# Altium PCB 32B48P_Dev_Board.PcbDoc
Units mil, origin at the board's own origin, x right, y up, seen from the top; angles counter-clockwise.
Board outline 2167.8 x 2470 mil, 4 copper layers (Top Layer, GND Layer, VCC3.3 Layer, Bottom Layer), stack 23.756 mil thick; 47 components, 53 nets, 216 pads, 52 vias.
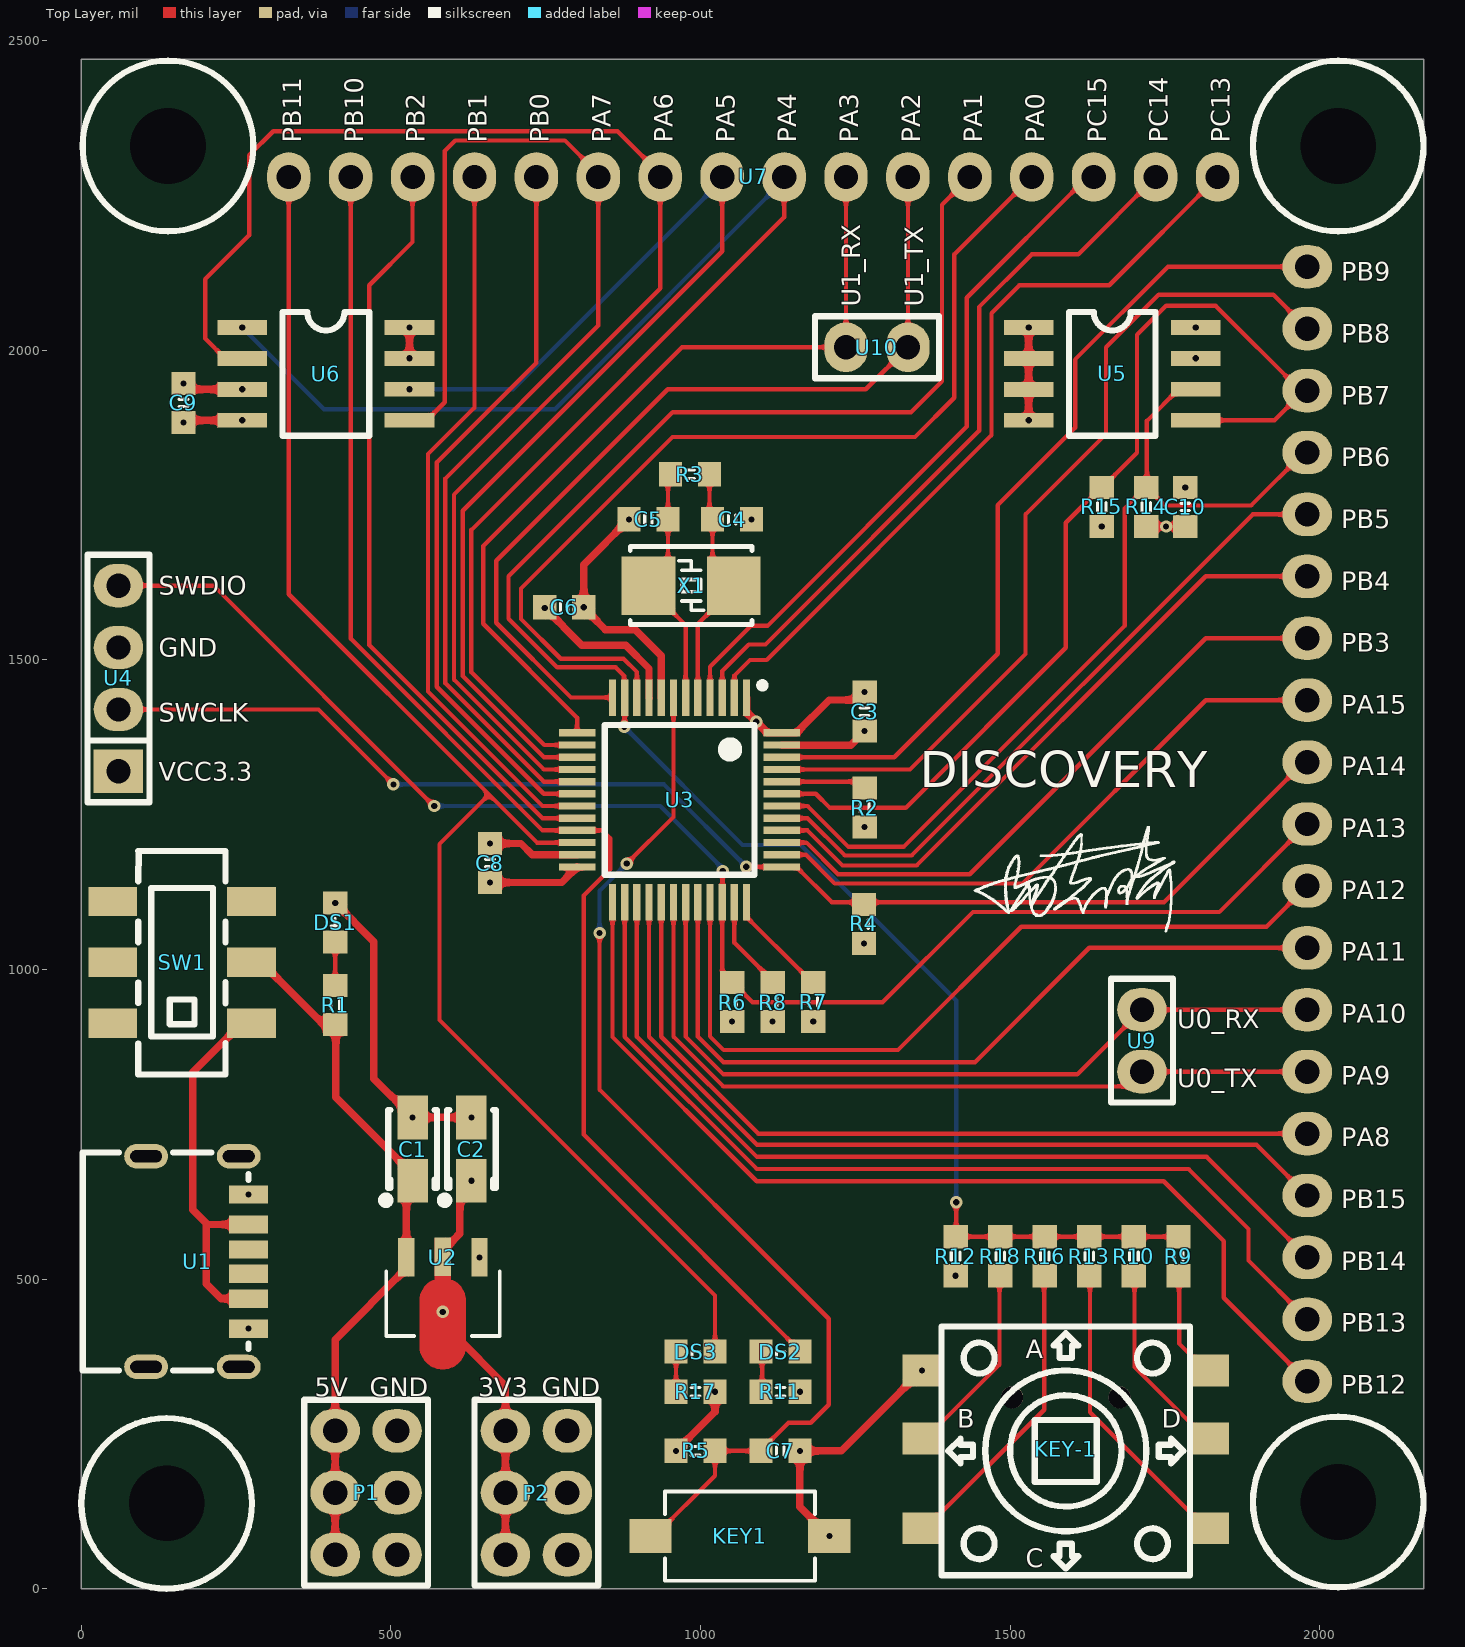
[diagram p0: Top Layer view]
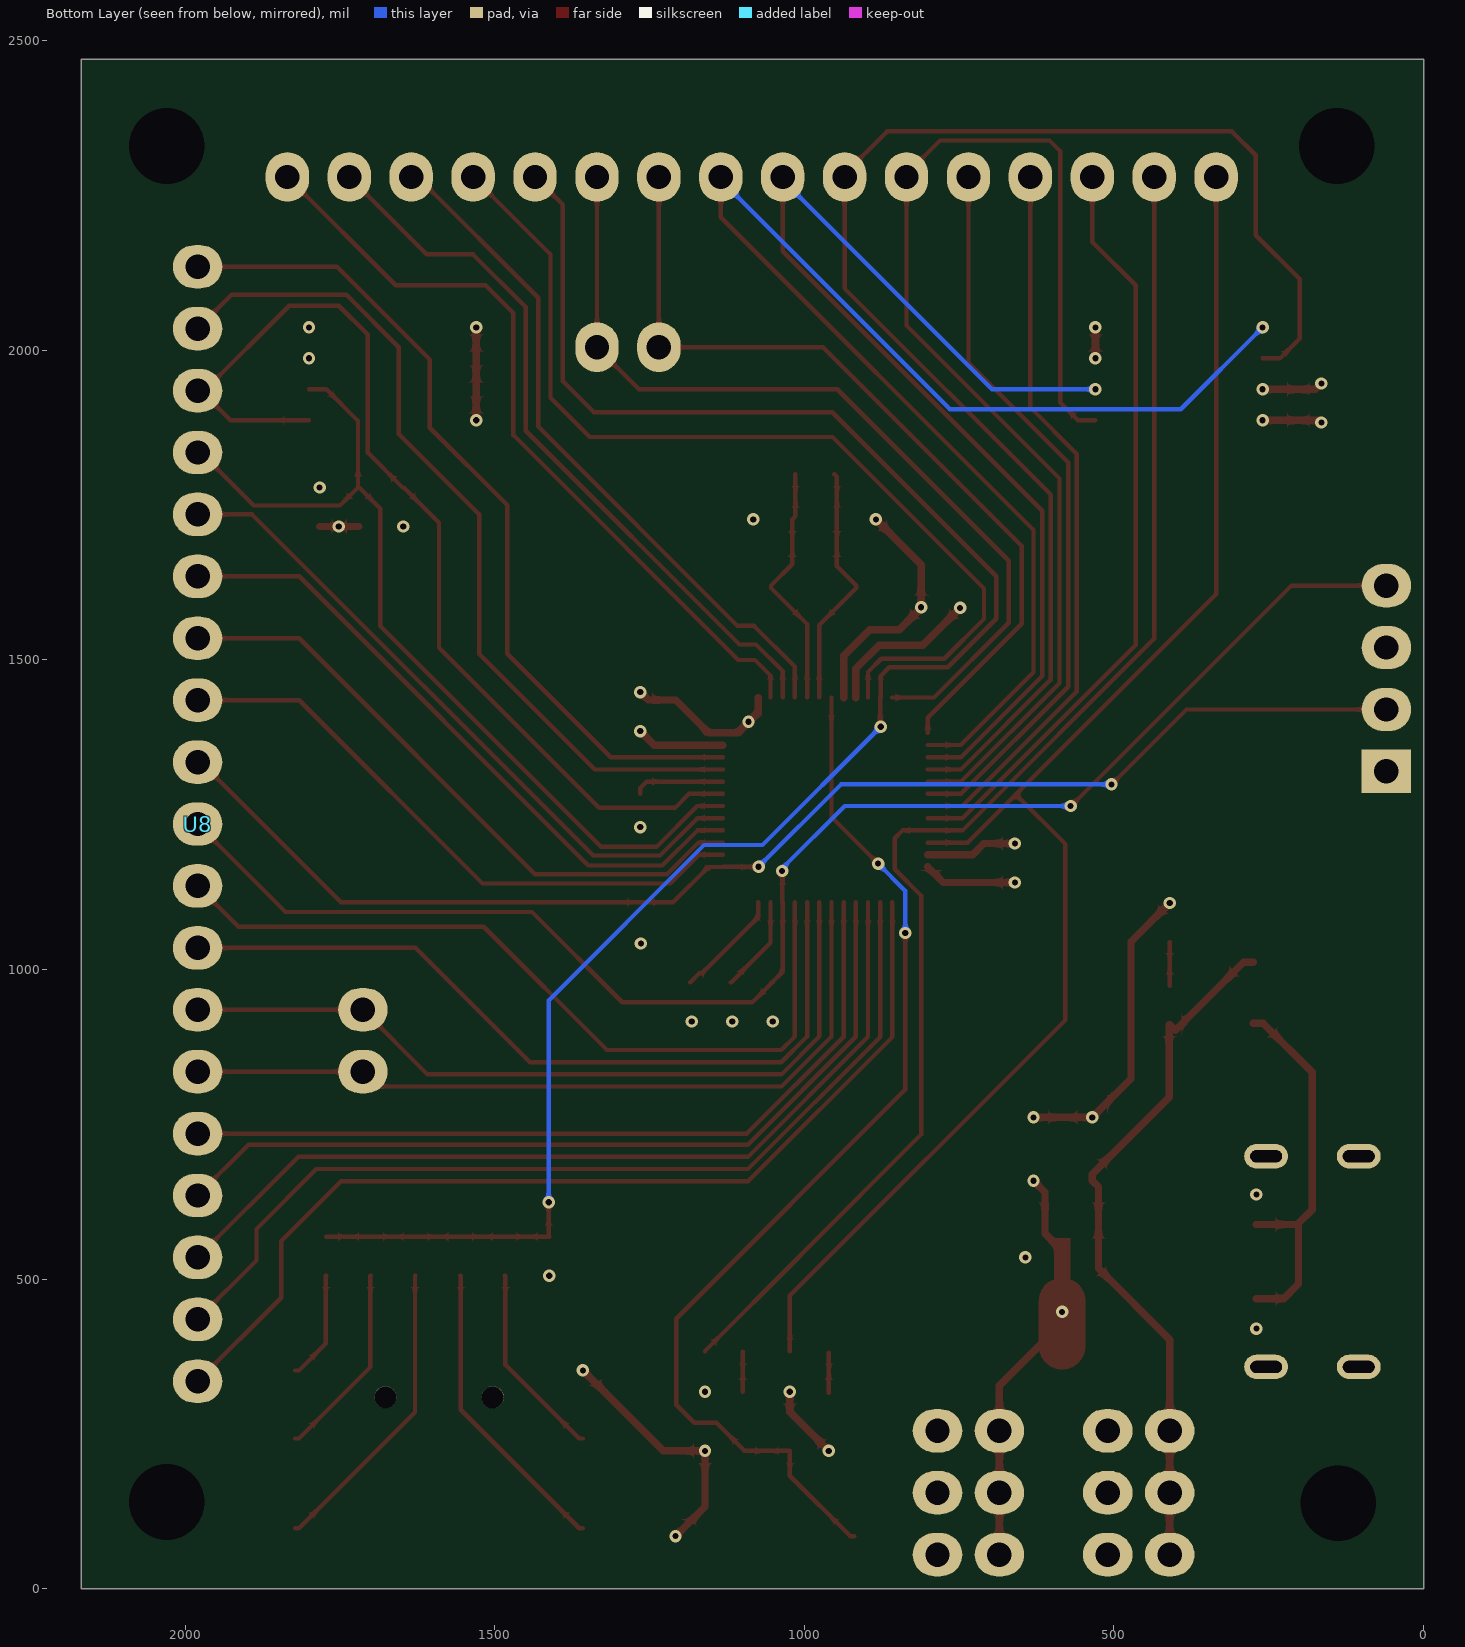
[diagram p1: Bottom Layer view, seen from below]
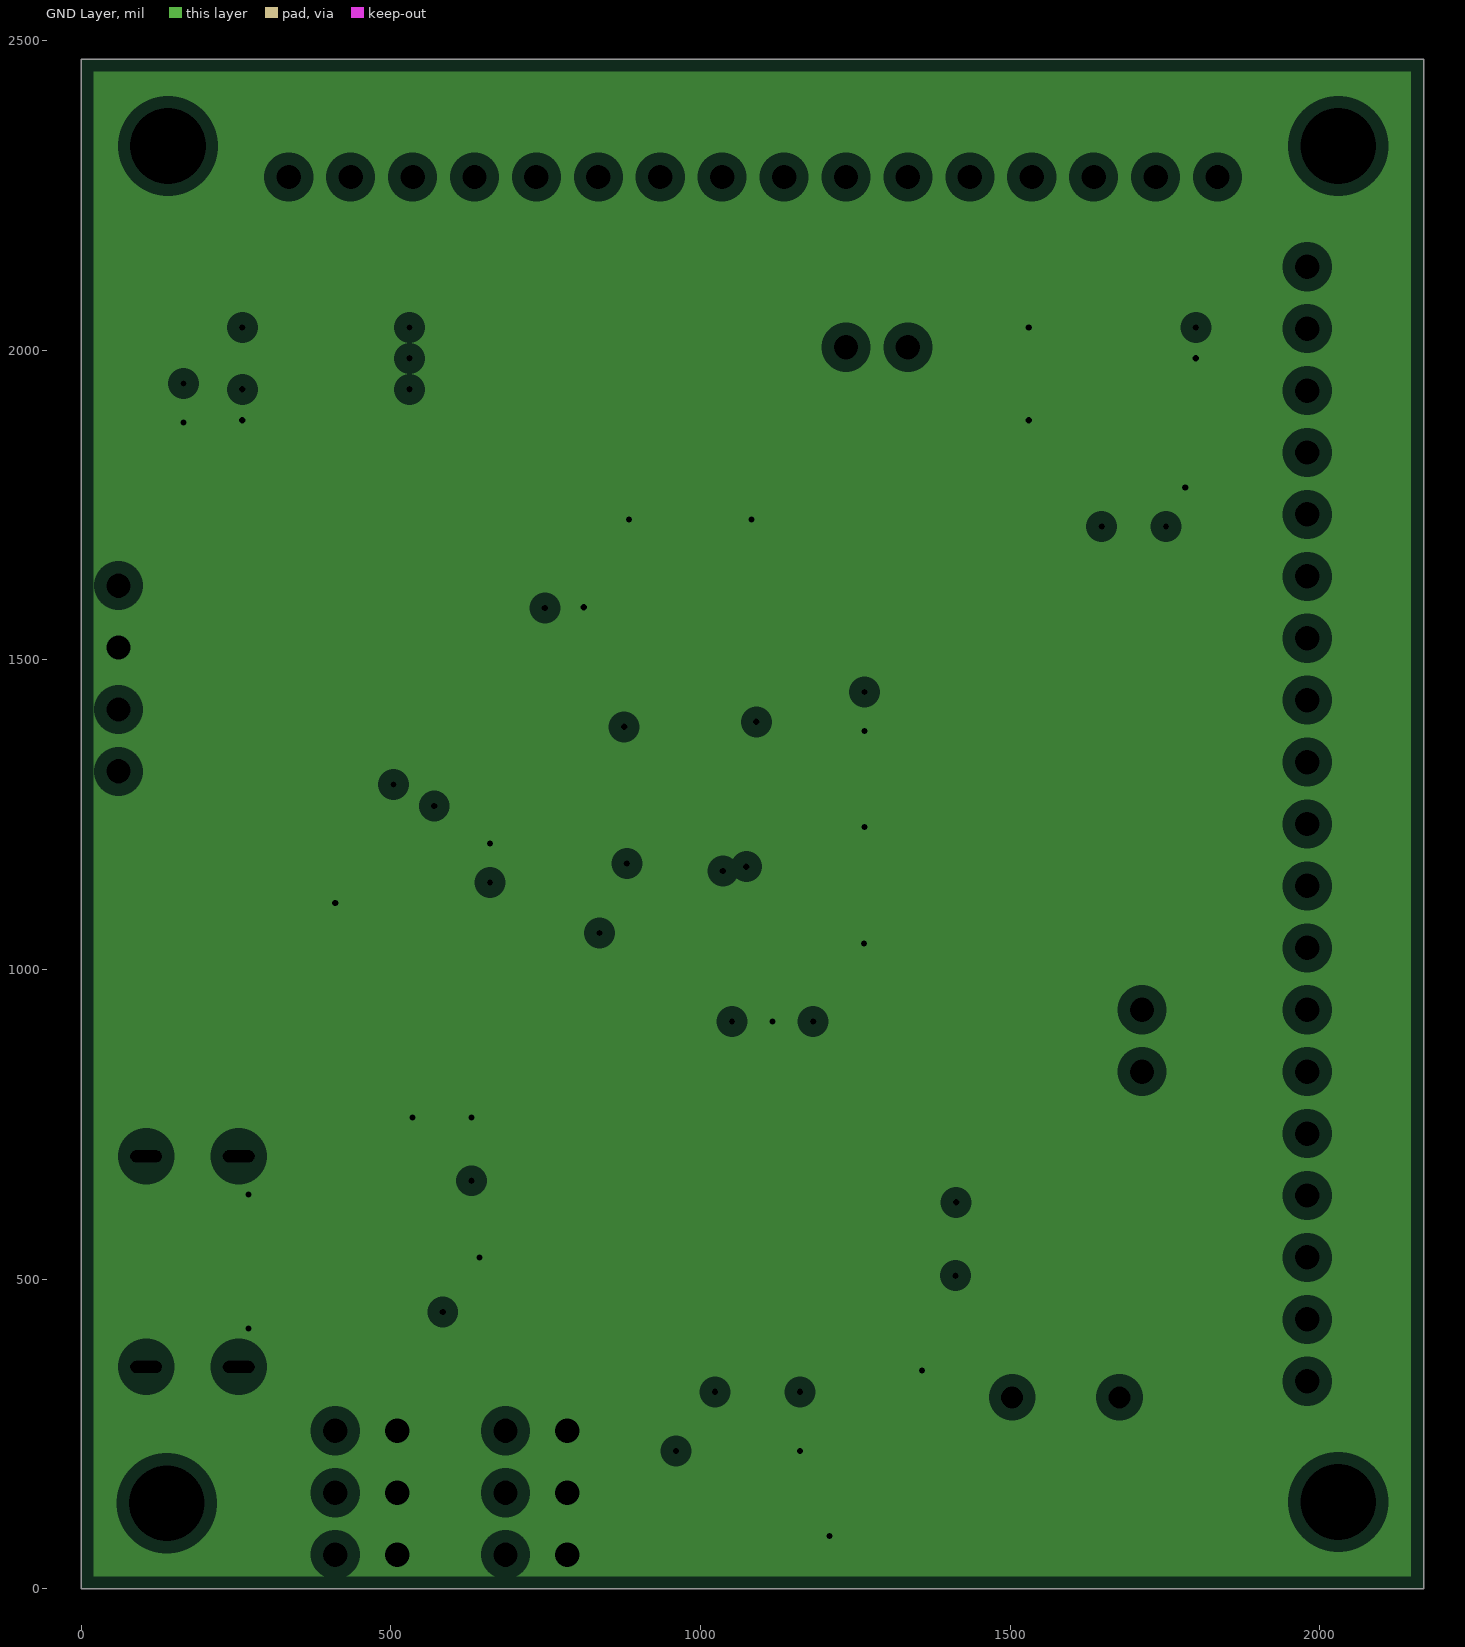
[diagram p2: GND Layer, clearances drawn from the general rule]
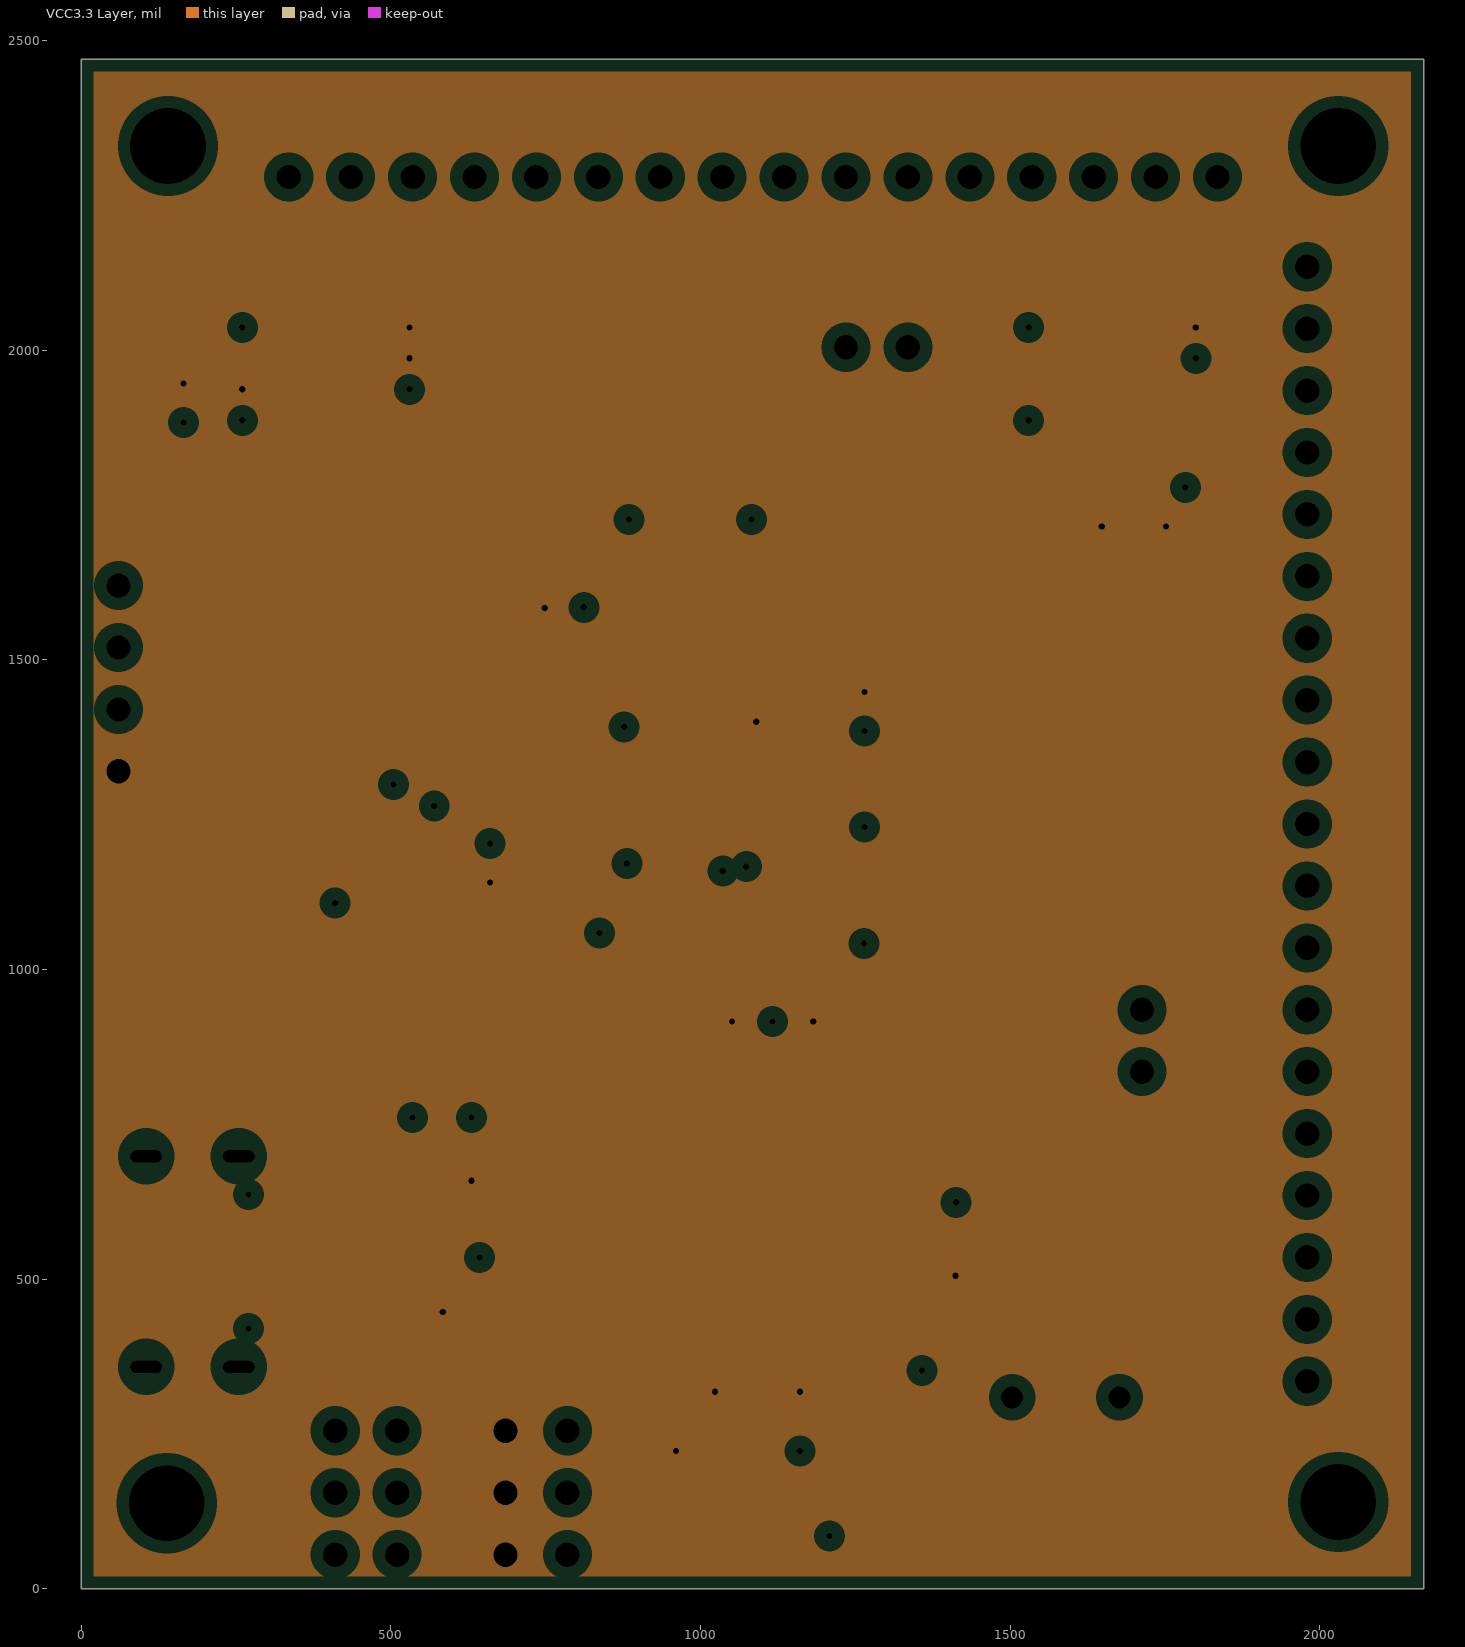
[diagram p3: VCC3.3 Layer, clearances drawn from the general rule]

## Layer stack, top to bottom
Top Solder: solder mask 0.4, Solder Resist, Dk 3.5
Top Layer: signal copper 1.4
Dielectric 2: prepreg 2.8, PP-006, Dk 4.1
GND Layer: plane copper 1.3779, net GND
Dielectric 1: dielectric 12.6, FR-4, Dk 4.8
VCC3.3 Layer: plane copper 1.3779, net VCC3.3
Dielectric 3: prepreg 2.8, PP-006, Dk 4.1
Bottom Layer: signal copper 1.4
Bottom Solder: solder mask 0.4, Solder Resist, Dk 3.5

## Board outline
0,0 0,2470 2167.79,2470 2167.8,0

## Design rules (kind name [scope] priority, off if disabled: settings)
Clearance [All] p1: gap=7 ignorepadtopadclearanceinfootprint=FALSE except(0: Arc-Hole Track-Hole SMDPad-Hole THPad-Hole Via-Hole Fill-Hole Poly-Hole Region-Hole Text-Hole)
ComponentClearance [All] p1: gap=0 collisioncheckmode=3 verticalgap=0 showdistances=FALSE
HoleSize [All] p1: absolutevalues=TRUE maxlimit=11100 minlimit=1 maxpercent=80.000 minpercent=20.000
HoleToHoleClearance [All] p1: gap=0 allowstackedmicrovias=TRUE
MinimumSolderMaskSliver [All] p1: minsoldermaskwidth=0
PlaneClearance [All] p1: clearance=20
PlaneConnect [All] p1: planeconnectstyle=Relief reliefexpansion=20 reliefentries=4 reliefconductorwidth=10 reliefairgap=10
PolygonConnect [All] p1: connectstyle=Relief reliefconductorwidth=10 reliefentries=4 polygonreliefangle="90 Angle" airgapwidth=10
RoutingVias [All] p1: holewidth=10 width=20 viastyle="Through Hole" minholewidth=1 minwidth=1 maxholewidth=2811 maxwidth=5011
SilkToSilkClearance [All] p1: silktosilkclearance=0
SilkToSolderMaskClearance [IsPad] p1: minsilkscreentomaskgap=0 clearancetoexposedcopper=TRUE
SolderMaskExpansion [All] p1: expansion=4
Width [All] p1: maxlimit=77 minlimit=7 preferedwidth=10 minimp=50.000000 maximp=50.000000 favimp=50.000000
22 further rules are at their usual default settings.

## Components (designator, comment, footprint, x,y, rotation, side; value= is the part's Value field where it differs from the comment)
C1 "10uF" CAP-TANTALUM-A 535,710 r90 top
C2 "22uF" CAP-TANTALUM-A 630,710 r90 top
C3 "104" Cap_0603 1265,1416.5 r270 top value=0.1u
C4 "20pF" Cap_0603 1051,1727 r180 top value=0.1u
C5 "20pF" Cap_0603 916,1727 r0 top value=0.1u
C6 "104" Cap_0603 780,1585 r0 top value=0.1u
C7 "104" Cap_0603 1129.01,222.5 r0 top value=0.1u
C8 "104" Cap_0603 660,1172 r270 top value=0.1u
C9 "104" Cap_0603 165,1915 r270 top value=0.1u
C10 "104" Cap_0603 1783,1747 r270 top value=0.1u
DS1 "LED" LED_0603 410,1076 r90 top
DS2 "LED" LED_0603 1129.01,383 r0 top
DS3 "LED" LED_0603 992.01,383 r0 top
KEY1 "KEY-2P" key3*6 1070,90 r0 top
KEY-1 "K1-1504SA-06" SW-SMD_K1-1504SA-06 1590,225 r0 top
P1 "PIN2x3" PIN-2x3-2.54-1.0 460,155 r270 top
P2 "PIN2x3" PIN-2x3-2.54-1.0 735,155 r270 top
R1 "2K" Res_0603 410,942.5 r90 top
R2 "10K" Res_0603 1265,1261.5 r270 top
R3 "1M" Res_0603 983,1800 r0 top
R4 "10K" Res_0603 1264,1073.5 r270 top
R5 "10K" Res_0603 992,222.5 r0 top
R6 "10K" Res_0603 1051,947.5 r90 top
R7 "0" Res_0603 1182,947.5 r270 top
R8 "0" Res_0603 1116.5,947.5 r270 top
R9 "0" Res_0603 1772,537 r90 top
R10 "36K" Res_0603 1700,537 r90 top
R11 "510" Res_0603 1129.01,318 r180 top
R12 "36K" Res_0603 1412,537 r90 top
R13 "10K" Res_0603 1628,537 r90 top
R14 "4.7K" Res_0603 1720,1747 r270 top
R15 "4.7K" Res_0603 1648,1747 r270 top
R16 "100K" Res_0603 1556,537 r90 top
R17 "510" Res_0603 992.01,318 r180 top
R18 "4.7K" Res_0603 1484,537 r90 top
SW1 "MST22D18G2" 6脚拨动开关 164.37,1010.58 r90 top
U1 "Type-C-6p" TYPEC-6P 143.28,524.94 r270 top
U2 "AMS1117" SOT-89 581.55,431.32 r90 top
U3 "STM32F103C8T6" QFP-48-0.5 966.12,1273.88 r270 top
U4 "ST-LINK" st-link 60,1470 r90 top
U5 "24C02" SOIC-8 1530,2037.06 r0 top
U6 "W25Q64" SOIC-8 260,2037.06 r0 top
U7 "PIN1x16" PIN1x16 1835,2280 r180 top
U8 "PIN1x19" PIN1x19 1980,2135 r270 bottom
U9 "U0" PIN-1x2-2.54 1713,935 r0 top
U10 "U1" PIN-1x2-2.54 1335,2005 r270 top
X1 "8MHz" "OSC 5032-2P" 985,1620 r180 top

## Footprints (in the part's own frame and the unit in brackets; to place one, negate y for a bottom-side part, rotate by r counter-clockwise, add the part's x,y. Pads: shape width x height; smd on the part's side, far side on the other; paste and mask are expansions set on the pad)
6脚拨动开关 [mm]
  rect 1.2x2 smd: 1(-2.474,2.89) 2(0.025,2.89) 3(2.525,2.89) 4(-2.474,-2.81) 5(0.025,-2.81) 6(2.525,-2.81)
  silkscreen extent -4.57,-1.74 4.6,1.84
CAP-TANTALUM-A [mm] "Tantalum Capacitor Case A, SMD"
  rect 1.8x1.25 smd: 1(-1.3,0) 2(1.3,0)
  silkscreen extent -2.23,-1 1.6,1.23, body extent -1.6,-0.8 1.6,0.8, height 1.6
Cap_0603 [mm] "SMD, 0603"
  rect 0.95x1 smd: 1(-0.8,0) 2(0.8,0)
  silkscreen extent -0.15,-0.18 0.15,0.18, body extent -0.77,-0.43 0.77,0.43, height 0.45
key3*6 [mm]
  rect 1.74x1.4 smd: 1(-3.829,-0.13) 2(3.511,-0.13)
  silkscreen extent -3.24,-1.96 2.92,1.7, body extent -4.16,-1.96 3.98,1.64, height 2.49
LED_0603 [mm] "SMD, 0603"
  rect 0.95x1 smd: 1(-0.8,0) 2(0.8,0)
  silkscreen extent -0.15,-0.18 0.18,0.18, body extent -0.8,-0.4 0.8,0.4, height 0.6
"OSC 5032-2P" [mm] "5mm*3.2mm*0.8mm(长*宽*高)"
  rect 2.2x2.4 smd: 1(-1.75,0) 2(1.75,0)
  silkscreen extent -2.5,-1.6 2.5,1.6, body extent -2.5,-1.6 2.5,1.6, height 0.86
PIN1x16 [mil] "Pin Header"
  oval 70x80 hole 39.37: 1(0,0) 2(100,0) 3(200,0) 4(300,0) 5(400,0) 6(500,0) 7(600,0) 8(700,0) 9(800,0) 10(900,0) 11(1000,0) 12(1100,0) 13(1200,0) 14(1300,0) 15(1400,0) 16(1500,0)
  body extent -50,-50 1550,50, height 398
PIN1x19 [mil] "Pin Header"
  oval 70x80 hole 39.37: 1(0,0) 2(100,0) 3(200,0) 4(300,0) 5(400,0) 6(500,0) 7(600,0) 8(700,0) 9(800,0) 10(900,0) 11(1000,0) 12(1100,0) 13(1200,0) 14(1300,0) 15(1400,0) 16(1500,0) 17(1600,0) 18(1700,0) 19(1800,0)
  body extent -50,-50 1850,50, height 398
PIN-1x2-2.54 [mil] "Pin Header"
  oval 80x70 hole 39.37: 1(0,0) 2(0,-100)
  silkscreen extent -50,-150 50,50, body extent -50,-150 50,50, height 336
PIN-2x3-2.54-1.0 [mil] "Pin Header"
  oval 70x80 hole 39.37: 1(-100,-50) 2(-100,50) 3(0,-50) 4(0,50) 5(100,-50) 6(100,50)
  silkscreen extent -150,-100 150,100, body extent -150,-100 150,100, height 398
QFP-48-0.5 [mm] "QFP-48"
  rect 1.5x0.3 smd: 1(-4.2,2.75) 2(-4.2,2.25) 3(-4.2,1.75) 4(-4.2,1.25) 5(-4.2,0.75) 6(-4.2,0.25) 7(-4.2,-0.25) 8(-4.2,-0.75) 9(-4.2,-1.25) 10(-4.2,-1.75) 11(-4.2,-2.25) 12(-4.2,-2.75) 25(4.2,-2.75) 26(4.2,-2.25) 27(4.2,-1.75) 28(4.2,-1.25) 29(4.2,-0.75) 30(4.2,-0.25) 31(4.2,0.25) 32(4.2,0.75) 33(4.2,1.25) 34(4.2,1.75) 35(4.2,2.25) 36(4.2,2.75)
  rect 0.3x1.5 smd: 13(-2.75,-4.2) 14(-2.25,-4.2) 15(-1.75,-4.2) 16(-1.25,-4.2) 17(-0.75,-4.2) 18(-0.25,-4.2) 19(0.25,-4.2) 20(0.75,-4.2) 21(1.25,-4.2) 22(1.75,-4.2) 23(2.25,-4.2) 24(2.75,-4.2) 37(2.75,4.2) 38(2.25,4.2) 39(1.75,4.2) 40(1.25,4.2) 41(0.75,4.2) 42(0.25,4.2) 43(-0.25,4.2) 44(-0.75,4.2) 45(-1.25,4.2) 46(-1.75,4.2) 47(-2.25,4.2) 48(-2.75,4.2)
  silkscreen extent -4.83,-3.07 3.07,3.53, body extent -4.51,-4.51 4.51,4.51, height 1.6
Res_0603 [mm] "SMD, 0603"
  rect 0.95x1 smd: 1(-0.8,0) 2(0.8,0)
  silkscreen extent -0.18,-0.18 0.18,0.18, body extent -0.77,-0.43 0.77,0.43, height 0.45
SOIC-8 [mil]
  rect 80x24 smd: 1(0,0) 2(0,-50.06) 3(0,-100.06) 4(0,-150.06) 5(270,-150) 6(270,-100) 7(270,-50) 8(270,0)
  silkscreen extent 65,-175 205,25, body extent 17,-171 253,21, height 67
SOT-89 [mm]
  rect 1.575x0.672 smd: 1(2.633,-1.564) 2(2.659,-0.062) 3(2.633,1.436)
  Top Layer region: -1.006,0.895 0.848,0.895 0.893,0.894 0.937,0.891 0.981,0.886 1.025,0.878 1.069,0.869 1.112,0.858 1.154,0.844 1.196,0.829 1.237,0.812 1.277,0.792 1.317,0.771 1.355,0.748 1.392,0.724 1.428,0.698 1.463,0.67 1.496,0.64 1.528,0.609 1.558,0.576 1.587,0.542 1.614,0.507 1.64,0.47 1.663,0.433 1.685,0.394 1.705,0.354 1.724,0.275 3.421,0.275 3.421,-0.385 1.724,-0.385 1.705,-0.464 1.685,-0.504 1.663,-0.543 1.64,-0.581 1.614,-0.617 1.587,-0.652 1.558,-0.686 1.528,-0.719 1.496,-0.75 1.463,-0.78 1.428,-0.808 1.392,-0.834 1.355,-0.859 1.317,-0.881 1.277,-0.903 1.237,-0.922 1.196,-0.939 1.154,-0.954 1.112,-0.968 1.069,-0.979 1.025,-0.988 0.981,-0.996 0.937,-1.001 0.893,-1.004 0.848,-1.005 -1.006,-1.005 -1.051,-1.004 -1.095,-1.001 -1.139,-0.996 -1.183,-0.988 -1.227,-0.979 -1.27,-0.968 -1.312,-0.954 -1.354,-0.939 -1.395,-0.922 -1.435,-0.903 -1.475,-0.881 -1.513,-0.859 -1.55,-0.834 -1.586,-0.808 -1.62,-0.78 -1.654,-0.75 -1.686,-0.719 -1.716,-0.686 -1.745,-0.652 -1.772,-0.617 -1.798,-0.581 -1.821,-0.543 -1.843,-0.504 -1.863,-0.464 -1.882,-0.424 -1.898,-0.382 -1.912,-0.34 -1.925,-0.297 -1.935,-0.254 -1.943,-0.21 -1.95,-0.166 -1.954,-0.122 -1.956,-0.077 -1.956,-0.033 -1.954,0.012 -1.95,0.056 -1.943,0.1 -1.935,0.144 -1.925,0.187 -1.912,0.23 -1.898,0.272 -1.882,0.314 -1.863,0.354 -1.843,0.394 -1.821,0.433 -1.798,0.47 -1.772,0.507 -1.745,0.542 -1.716,0.576 -1.686,0.609 -1.654,0.64 -1.62,0.67 -1.586,0.698 -1.55,0.724 -1.513,0.748 -1.475,0.771 -1.435,0.792 -1.395,0.812 -1.354,0.829 -1.312,0.844 -1.27,0.858 -1.227,0.869 -1.183,0.878 -1.139,0.886 -1.095,0.891 -1.051,0.894
  silkscreen extent -0.59,-2.39 2.06,2.26, body extent -1.12,-2.31 2.88,2.19, height 1.5
st-link [mil] "Pin Header"
  rect 70x80 hole 39.37: 1(-150,0)
  oval 70x80 hole 39.37: 2(-50,0) 3(50,0) 4(150,0)
  silkscreen extent -200,-50 200,50, body extent -200,-50 200,50, height 398
SW-SMD_K1-1504SA-06 [mil] "五向按键"
  rect 62.99x51.18 smd: 1(-232.28,127.5) 2(-232.28,17.5) 3(-232.28,-127.5) 4(232.28,127.5) 5(232.28,17.5) 6(232.28,-127.5)
  round 35.43 hole 35.43 unplated: ""(-86.61,84.1) ""(86.6,84.1)
  silkscreen extent -201,-203 201,198
TYPEC-6P [mm]
  oval 1x1.8 hole 0.5 slot 1.3 at 90 deg: 1(-4.405,2.819) 2(-4.405,-0.981) 3(4.235,-0.981) 4(4.235,2.819)
  rect 0.75x1.6 smd: A5(-0.585,3.219) A9(1.435,3.219) A12(2.665,3.219) B5(0.415,3.219) B9(-1.605,3.219) B12(-2.835,3.219)
  silkscreen extent -4.56,-3.58 4.39,3.22, body extent -5.35,-4.6 5.19,3.75, height 4.79

## Part data
C1 C2: library part CAP-TANTALUM, "Tantalum Capacitor"
C3 C4 C5 C6 C7 C8 C9 C10: library part CAP, "Capacitor"
DS1 DS2 DS3: PackageDocument=Feb-2002, LatestRevisionDate=17-Jul-2002, LatestRevisionNote="Re-released for DXP Platform.", PackageReference=3.2X1.6X1.1, Published=8-Jun-2000, Publisher="Altium Limited"
KEY1: "Switch"
KEY-1: "五向按键", BOM_Manufacturer=HRO, BOM_Manufacturer Part=K1-1504SA-06, BOM_Supplier=LCSC, BOM_Supplier Part=C136712, Contributor=LCSC, spicePre=S, spiceSymbolName=K1-1504SA-06
P1 P2: "Connector"
R1 R2 R3 R4 R5 R6 R7 R8 R11 R14 R15 R17: library part RES
R9 R10 R12 R13 R16 R18: library part RES, "Resistor"
SW1: library part 6脚拨动开关, BOM_JLCPCB Part Class="Extended Part", BOM_Manufacturer="SHOU HAN(Ê×º", BOM_Manufacturer Part=MST22D18G2, BOM_Supplier=LCSC, BOM_Supplier Part=C431544, Contributor=LCSC, spicePre=S, spiceSymbolName=MST22D18G2
U3: library part GD32F330Cx
U4: library part PIN1x4, "Connector"
U9 U10: library part PIN1x2, "Connector"
X1: library part Crystal, "Crystal"

## Free pads (board coordinates)
  round 39.37 hole 122.05: 5(137.8,137.8) 5(140,2330) 5(2030,140) 5(2030,2330)

## Via types
v1: diameter 20, hole 10, Top Layer to Bottom Layer, tented both sides, 52 vias

## Nets (pads, with @x,y where several pads share a name; then routed paths per layer and width w, separated by ;. In a path a pad name is that pad's centre, name@x,y a point inside that pad or via, vN(x,y) a via of type N, cw(c..) or ccw(c..) an arc to the next point about the centre after c; other vN are vias at no path point)
ADC_KEY: R9.2 R10.2 R12.2 R13.2 R16.2 R18.2 U3.11 U7.5 | length 3017.2
  Top Layer w7: v1(876.77,1392) 877.54,1392.77 U3.11 876.76,1439.24 876.76,1474.15 862.9,1488 768.41,1488 690,1566.41 690,1635 955,1900 1340,1900 1390,1950 1390,2235 U7.5 ; v1(1413,624) 1413,569.5 R12.2 R18.2 R16.2 R13.2 R10.2 R9.2
  Bottom Layer w7: v1(876.77,1392) 1067.77,1201 1162,1201 1413,950 v1(1413,624)
FLASH_CS: U3.14 U6.1 U7.8 | length 2316.6
  Top Layer w7: U3.14 747.54,1362.46 630,1480 630,1710 1135,2215 U7.8
  Bottom Layer w7: v1(260,2037.06) 260,2037 392,1905 765,1905 1135,2275 U7.8
GND: C1.2 C2.2 C3.2 C4.1 C5.1 C6.2 C7.2 C8.1 C9.2 C10.1 DS1.2 KEY1.2 KEY-1.1 P1.2 P1.4 P1.6 P2.2 P2.4 P2.6 R2.2 R4.2 R8.2 U1.A12 U1.B12 U2.1 U3.8 U3.23 U3.47 U4.3 U5.1 U5.2 U5.3 U5.4 U5.7 U6.4 | length 1837.2
  Top Layer w12: v1(165,1883.5) 168.5,1887 v1(260,1887) ; v1(410,1107.5) 472.5,1045 472.5,823.68 v1(535,761.18) v1(630,761.18) ; v1(660,1203.5) 710.06,1203.5 728.26,1185.3 U3.23 ; v1(884.5,1727) 811.5,1653.99 v1(811.5,1585) 811.5,1584.02 846.51,1549 894.56,1549 936.59,1506.97 U3.8 ; U3.47 1242.46,1362.46 v1(1265,1385) ; v1(1208.23,84.9) 1160.5,132.62 v1(1160.5,222.5) 1227.72,222.5 v1(1357.72,352.5) ; v1(1530,1887) U5.3 U5.2 v1(1530,2037.06)
  other v1: 270,420 643.11,535 270,636.54 1116.5,916 1264,1042 1265,1230.01 1082.5,1727 1783,1778.5 1800,1987.06
IIC_SCL: R14.1 U3.42 U5.6 U8.4 | length 1482.6
  Top Layer w7: U3.42 1172.96,1264.04 1239,1198 1328,1198 1685,1555 1685,1744.48 1719.02,1778.5 R14.1 R14.1@1720.98,1778.5 ; U5.6 1772,1937.06 1720.98,1886.05 R14.1@1720.98,1778.5 ; U8.4 1975,1835 1889.3,1749.3 1750.19,1749.3 R14.1@1720.98,1778.5
IIC_SDA: R15.1 U3.43 U5.5 U8.3 | length 1675.3
  Top Layer w7: U3.43 1186.28,1283.72 1209,1261 1331.36,1261 1590,1519.64 1590,1721.48 1647.02,1778.5 R15.1 1648.98,1778.5 1705,1834.51 1705,2025 1752,2072 1831.91,2072 1968.91,1935 U8.3@1975,1935 ; U5.5 1927.06,1887.06 U8.3@1975,1935 ; U8.3 U8.3@1975,1935
LED0: DS2.2 U3.21 U7.15 | length 2289.3
  Top Layer w7: U7.15 435,1534.4 744.73,1224.67 U3.21 841.33,1224.67 854,1212 854,1162 811.5,1119.5 811.5,733.5 1006,539 1006,538.49 1160.5,383.98 DS2.2
LED1: DS3.2 U3.22 U7.16 | length 2422.9
  Top Layer w7: U7.16 335,1606 658.5,1282.5 ; U3.22 736.02,1204.98 658.5,1282.5 ; DS3.2 1023.5,473.5 578.47,918.53 578.47,1202.47 658.5,1282.5
NetC4_2: C4.2 R3.2 U3.5 X1.1 | length 401.2
  Top Layer w7: U3.5 995.65,1557.81 1053.9,1616.06 X1.1 1019.5,1654.39 C4.2 1014.5,1732.01 R3.2
NetC5_2: C5.2 R3.1 U3.6 X1.2 | length 400.2
  Top Layer w7: R3.1 947.5,1795.99 C5.2 947.5,1651.39 X1.2 916.1,1616.06 975.96,1556.2 U3.6
NetDS1_1: DS1.1 R1.2 | length 70.5
  Top Layer w7: R1.2 DS1.1
NetDS2_1: DS2.1 R11.2 | length 65
  Top Layer w7: R11.2@1099.5,318 DS2.1@1099.5,383
NetDS3_1: DS3.1 R17.2 | length 65
  Top Layer w7: R17.2@960.51,316 DS3.1@960.51,381
NetKEY-1_2: KEY-1.2 R18.1 | length 319.3
  Top Layer w7: KEY-1.2 1363.61,242.5 1483.02,361.9 1483.02,505.5 R18.1
NetKEY-1_3: KEY-1.3 R16.1 | length 494.2
  Top Layer w7: KEY-1.3 1363.61,97.5 1555.02,288.9 1555.02,505.5 R16.1
NetKEY-1_4: KEY-1.4 R9.1 | length 177.9
  Top Layer w7: R9.1 1772.98,505.5 1772.98,395.9 1816.39,352.5 KEY-1.4
NetKEY-1_5: KEY-1.5 R10.1 | length 317.7
  Top Layer w7: R10.1 1700.98,505.5 1700.98,357.9 1816.39,242.5 KEY-1.5
NetKEY-1_6: KEY-1.6 R13.1 | length 492.5
  Top Layer w7: R13.1 1628.98,505.5 1628.98,284.89 1816.38,97.5 KEY-1.6
NetR2_1: R2.1 U3.44 | length 147.1
  Top Layer w7: U3.44 1254.59,1303.41 R2.1 R2.1@1265,1283.74
NetR7_1: R7.1 U3.36 | length 177.6
  Top Layer w7: U3.36 1074.39,1084.91 1165.09,994.2 1169.3,994.2 R7.1@1184.5,979
NetR8_1: R8.1 U3.35 | length 156.7
  Top Layer w7: U3.35 1054.7,1043.3 1102.82,995.18 1102.82,994.2 1118.02,979 R8.1@1119,979
PA0: U3.10 U7.4 | length 1549
  Top Layer w7: U3.10 897.22,1480.55 875.77,1502 774.2,1502 710,1566.2 710,1615.27 954.73,1860 1346.5,1860 1410,1923.5 1410,2155 U7.4
PA2: U3.12 U7.6 U10.1 | length 1420.8
  Top Layer w7: U3.12 790.76,1439.24 670,1560 670,1660 947.06,1937.06 1267.06,1937.06 U10.1 U7.6
PA3: U3.13 U7.7 U10.2 | length 1358.7
  Top Layer w7: U3.13 800.76,1406.61 649,1558.37 649,1684 970,2005 U10.2 U7.7
PA5: U3.15 U6.6 U7.9 | length 1873.7
  Top Layer w7: U3.15 747.22,1342.78 616,1474 616,1741 1035,2160 U7.9 U7.9@1035,2285
  Bottom Layer w7: v1(530,1937.06) 697.06,1937.06 1035,2275 U7.9
PA6: U3.16 U6.2 U7.10 | length 2321
  Top Layer w7: U6.2 232,1987 200,2019 200,2115 271,2186 271,2315 310,2354 866,2354 935,2285 U7.10 935,2100 602,1767 602,1468.2 747.11,1323.09 U3.16
PA7: U3.17 U6.5 U7.11 | length 1955.9
  Top Layer w7: U6.5 558,1887.06 587,1916.06 587,2322 604,2339 781,2339 835,2285 U7.11 835,2040 588,1793 588,1462.4 746.99,1303.41 U3.17
PA8: U3.29 U8.15 | length 1325.2
  Top Layer w7: U3.29 936.59,891.54 1093.14,735 U8.15
PA9: U3.30 U8.14 U9.2 | length 1284
  Top Layer w7: U3.30 956.28,891.66 1036.99,810.94 1688.95,810.94 U9.2 U8.14
PA10: U3.31 U8.13 U9.1 | length 1289.4
  Top Layer w7: U3.31 975.96,891.77 1037.1,830.63 1608.63,830.63 U9.1 U8.13
PA11: U3.32 U8.12 | length 1294.7
  Top Layer w7: U3.32 995.65,891.89 1037.22,850.31 1443.31,850.31 1628,1035 U8.12
PA12: U3.33 U8.11 | length 1300.1
  Top Layer w7: U3.33 1015.33,892 1037.33,870 1319,870 1518,1069 1914,1069 U8.11
PA13: R6.2 U3.34 U4.4 U8.10 | length 2419.5
  Top Layer w7: U4.4 213.25,1620 569.21,1264.04 v1(570.01,1264.04) ; v1(1036,1159) 1035.51,1158.51 1035.51,1109.02 U3.34 1035.02,996.5 1052.52,979 R6.2@1053.5,979 ; R6.2 1051.98,978.99 1083.98,947 1294,947 1440,1093 1838,1093 U8.10
  Bottom Layer w7: v1(570.01,1264.04) 934.96,1264.04 1036,1163 v1(1036,1159)
PA14: R4.1 U3.37 U4.2 U8.9 | length 2142.8
  Top Layer w7: U4.2 383,1420 v1(504,1299) ; v1(1074,1166) 1074.19,1165.81 1131.28,1165.81 U3.37 1155.09,1165.61 1212.18,1108.53 1748.53,1108.53 1975,1335 U8.9
  Bottom Layer w7: v1(504,1299) 941,1299 v1(1074,1166)
PA15: U3.38 U8.8 | length 990.3
  Top Layer w7: U3.38 1170.32,1185.3 1216.61,1139 1520,1139 1816,1435 U8.8
PB0: U3.18 U7.12 | length 1188.5
  Top Layer w7: U7.12 735,1980 574,1819 574,1456.6 746.88,1283.72 U3.18
PB1: U3.19 U7.13 | length 1179.4
  Top Layer w7: U7.13 635,1907.52 560,1832.52 560,1449 744.96,1264.04 U3.19
PB2: U3.20 U7.14 | length 1236.5
  Top Layer w7: U7.14 535,2175 465,2105 465,1524.2 744.85,1244.35 U3.20
PB3: U3.39 U8.7 | length 1027.5
  Top Layer w7: U3.39 1171.02,1204.98 1222,1154 1435,1154 1816,1535 U8.7
PB4: U3.40 U8.6 | length 1065.4
  Top Layer w7: U3.40 1172.73,1224.67 1229.4,1168 1349,1168 1816,1635 U8.6
PB5: U3.41 U8.5 | length 1101.8
  Top Layer w7: U3.41 1172.85,1244.35 1233.2,1184 1341,1184 1892,1735 U8.5
PB8: U3.45 U8.2 | length 1403
  Top Layer w7: U3.45 1338.45,1323.09 1525,1509.64 1525,1735 1655,1865 1655,2005 1740,2090 1925,2090 U8.2
PB9: U3.46 U8.1 | length 1381.7
  Top Layer w7: U3.46 1312.78,1342.78 1480,1510 1480,1750 1605,1875 1605,1985 1755,2135 U8.1
PB12: U3.25 U8.19 | length 1623.5
  Top Layer w7: U3.25 857.85,891.09 1090.92,658.02 1748.36,658.02 1845,561.38 1845,470 U8.19
PB13: U3.26 U8.18 | length 1538.6
  Top Layer w7: U3.26 877.54,891.2 1091.03,677.7 1788.3,677.7 1885,581 1885,530 U8.18
PB14: U3.27 U8.17 | length 1447.6
  Top Layer w7: U3.27 897.22,891.32 1091.15,697.39 1817.61,697.39 U8.17
PB15: U3.28 U8.16 | length 1386.4
  Top Layer w7: U3.28 916.91,891.43 1091.26,717.07 1897.93,717.07 U8.16
PC13: U3.2 U7.1 | length 1264.7
  Top Layer w7: U3.2 1054.7,1474.76 1079.94,1500 1106.88,1500 1470,1863.12 1470,2060 1515,2105 1660,2105 U7.1
PC14: U3.3 U7.2 | length 1190.4
  Top Layer w7: U3.3 1035.11,1439.33 1035.11,1482.04 1078.07,1525 1105,1525 1450,1870 1450,2070 1535,2155 1610,2155 U7.2
PC15: U3.4 U7.3 | length 1119.1
  Top Layer w7: U3.4 1015.33,1489.13 1081.2,1555 1108.14,1555 1430,1876.86 1430,2085 1625,2280 U7.3
RESET: C7.1 KEY1.1 R5.2 U3.7 | length 1744.5
  Top Layer w7: v1(837,1059) 837,806 1207,436 1207,297 1178,268 1142.03,268 1097.51,223.48 C7.1 R5.2 1023.5,182.45 925.94,84.9 KEY1.1 ; v1(881,1171) 956.28,1246.28 U3.7
  Bottom Layer w7: v1(837,1059) 837,1127 v1(881,1171)
VBUS: SW1.4 U1.A9 U1.B9 | length 622.5
  Top Layer w12: 202.03,590 180,612.03 180,833.91 259.25,913.16 SW1.4 ; U1.A9 225.91,468.42 202.03,492.3 202.03,588.11 U1.B9
VCC3.3: C2.1 C3.1 C6.1 C8.2 C9.1 C10.2 P2.1 P2.3 P2.5 R5.1 R6.1 R7.2 R11.1 R12.1 R14.2 R15.2 R17.1 U2.2 U3.1 U3.9 U3.24 U3.48 U4.1 U5.8 U6.3 U6.7 U6.8 | length 1527.6
  Top Layer w12: v1(165,1946.5) 174.5,1937 v1(260,1937) ; v1(530,1987.06) v1(530,2037.06) ; U2.2 584,545.78 611.39,573.17 611.39,640.21 v1(630,658.82) ; 602.92,410 685,327.92 P2.1 P2.5 ; v1(660,1140.5) 775.65,1140.5 U3.24 ; C6.1 v1(748.5,1584.02) 808.52,1524 879,1524 916.81,1486.19 916.81,1439.33 U3.9 ; v1(960.5,222.5) 1023.5,285.5 v1(1023.5,318) ; U3.1 1074.39,1415.8 1107.94,1382.24 1131.38,1382.24 U3.48 1154.91,1382.15 1208.05,1435.29 1252.3,1435.29 v1(1265,1447.99) ; R14.2 C10.2
  other v1: 1160.5,318 583.71,447 1412,505.5 1051,916 1182,916 1090.19,1400 1648,1715.5 1752,1715.5 1800,2037.06
VIN: C1.1 P1.1 P1.3 P1.5 R1.1 SW1.5 U2.3 | length 1144.5
  Top Layer w12: SW1.5 290.74,1011.58 400.66,901.66 R1.1 410.98,911 410.98,793.66 535,669.65 C1.1 525,648.82 U2.3 525,517.22 410,402.22 P1.1 P1.5
pads on no net: KEY-1. SW1.1 SW1.2 SW1.3 SW1.6 U1.1 U1.2 U1.3 U1.4 U1.A5 U1.B5

## Polygon pours and split planes (outlines as drawn)
GND on GND Layer (split plane): 2147.7,20.1 20.1,20.1 20.1,2449.9 2147.7,2449.9
VCC3.3 on VCC3.3 Layer (split plane): 2147.7,20.1 20.1,20.1 20.1,2449.9 2147.7,2449.9

## Silkscreen, mask and mechanical layers (free items; w line width, h text height)
Top Overlay:
  drawing of 3515 lines, arcs and shapes, not listed
  text "PB11" at 355,2335 h30 r90
  text "PB10" at 455,2335 h30 r90
  text "PB2" at 555,2335 h30 r90
  text "PB1" at 655,2335 h30 r90
  text "PB0" at 755,2335 h30 r90
  text "PA7" at 855,2335 h30 r90
  text "PA6" at 955,2335 h30 r90
  text "PA5" at 1055,2335 h30 r90
  text "PA4" at 1155,2335 h30 r90
  text "PA3" at 1255,2335 h30 r90
  text "PA2" at 1355,2335 h30 r90
  text "PA1" at 1455,2335 h30 r90
  text "PA0" at 1555,2335 h30 r90
  text "PC15" at 1655,2335 h30 r90
  text "PC14" at 1755,2335 h30 r90
  text "PC13" at 1855,2335 h30 r90
  text "PB9" at 2035,2112 h30
  text "U1_RX" at 1258,2070 h30 r90
  text "U1_TX" at 1360,2070 h30 r90
  text "PB8" at 2035,2012.17 h30
  text "PB7" at 2035,1912.33 h30
  text "PB6" at 2035,1812.5 h30
  text "PB5" at 2035,1712.67 h30
  text "PB4" at 2035,1612.83 h30
  text "PB3" at 2035,1513 h30
  text "PA15" at 2035,1413.17 h30
  text "PA14" at 2035,1313.33 h30
  text "DISCOVERY" at 1354,1275 h100
  text "PA13" at 2035,1213.5 h30
  text "PA12" at 2035,1113.67 h30
  text "PA11" at 2035,1013.83 h30
  text "PA10" at 2035,914 h30
  text "U0_RX" at 1770,905 h30
  text "PA9" at 2035,814.17 h30
  text "U0_TX" at 1770,810 h30
  text "PA8" at 2035,714.33 h30
  text "PB15" at 2035,614.5 h30
  text "PB14" at 2035,514.67 h30
  text "PB13" at 2035,414.83 h30
  text "PB12" at 2035,315 h30
  text "5V" at 377,311 h30
  text "GND" at 466,311 h30
  text "3V3" at 641,311 h30
  text "GND" at 744,311 h30
Mechanical 1:
  the board outline again, w10

## Text inside footprints (layer, text, board x,y; h text height)
KEY-1: Top Overlay "A" at 1525,372.5 h30; Top Overlay "B" at 1415,260 h30; Top Overlay "C" at 1525,35 h30; Top Overlay "D" at 1745,260 h30
U4: Top Overlay "VCC3.3" at 125,1305 h30; Top Overlay "SWCLK" at 125,1400 h30; Top Overlay "GND" at 125,1505 h30; Top Overlay "SWDIO" at 125,1605 h30